# Altium PCB mchf_pro_ui.PcbDoc (part 2 of 7)
Units mil, origin at the board's own origin, x right, y up, seen from the top; angles counter-clockwise.
Board outline 7877.73 x 5661.04 mil, 2 copper layers (Top Layer, Bottom Layer); 345 components, 345 nets, 1318 pads, 783 vias.
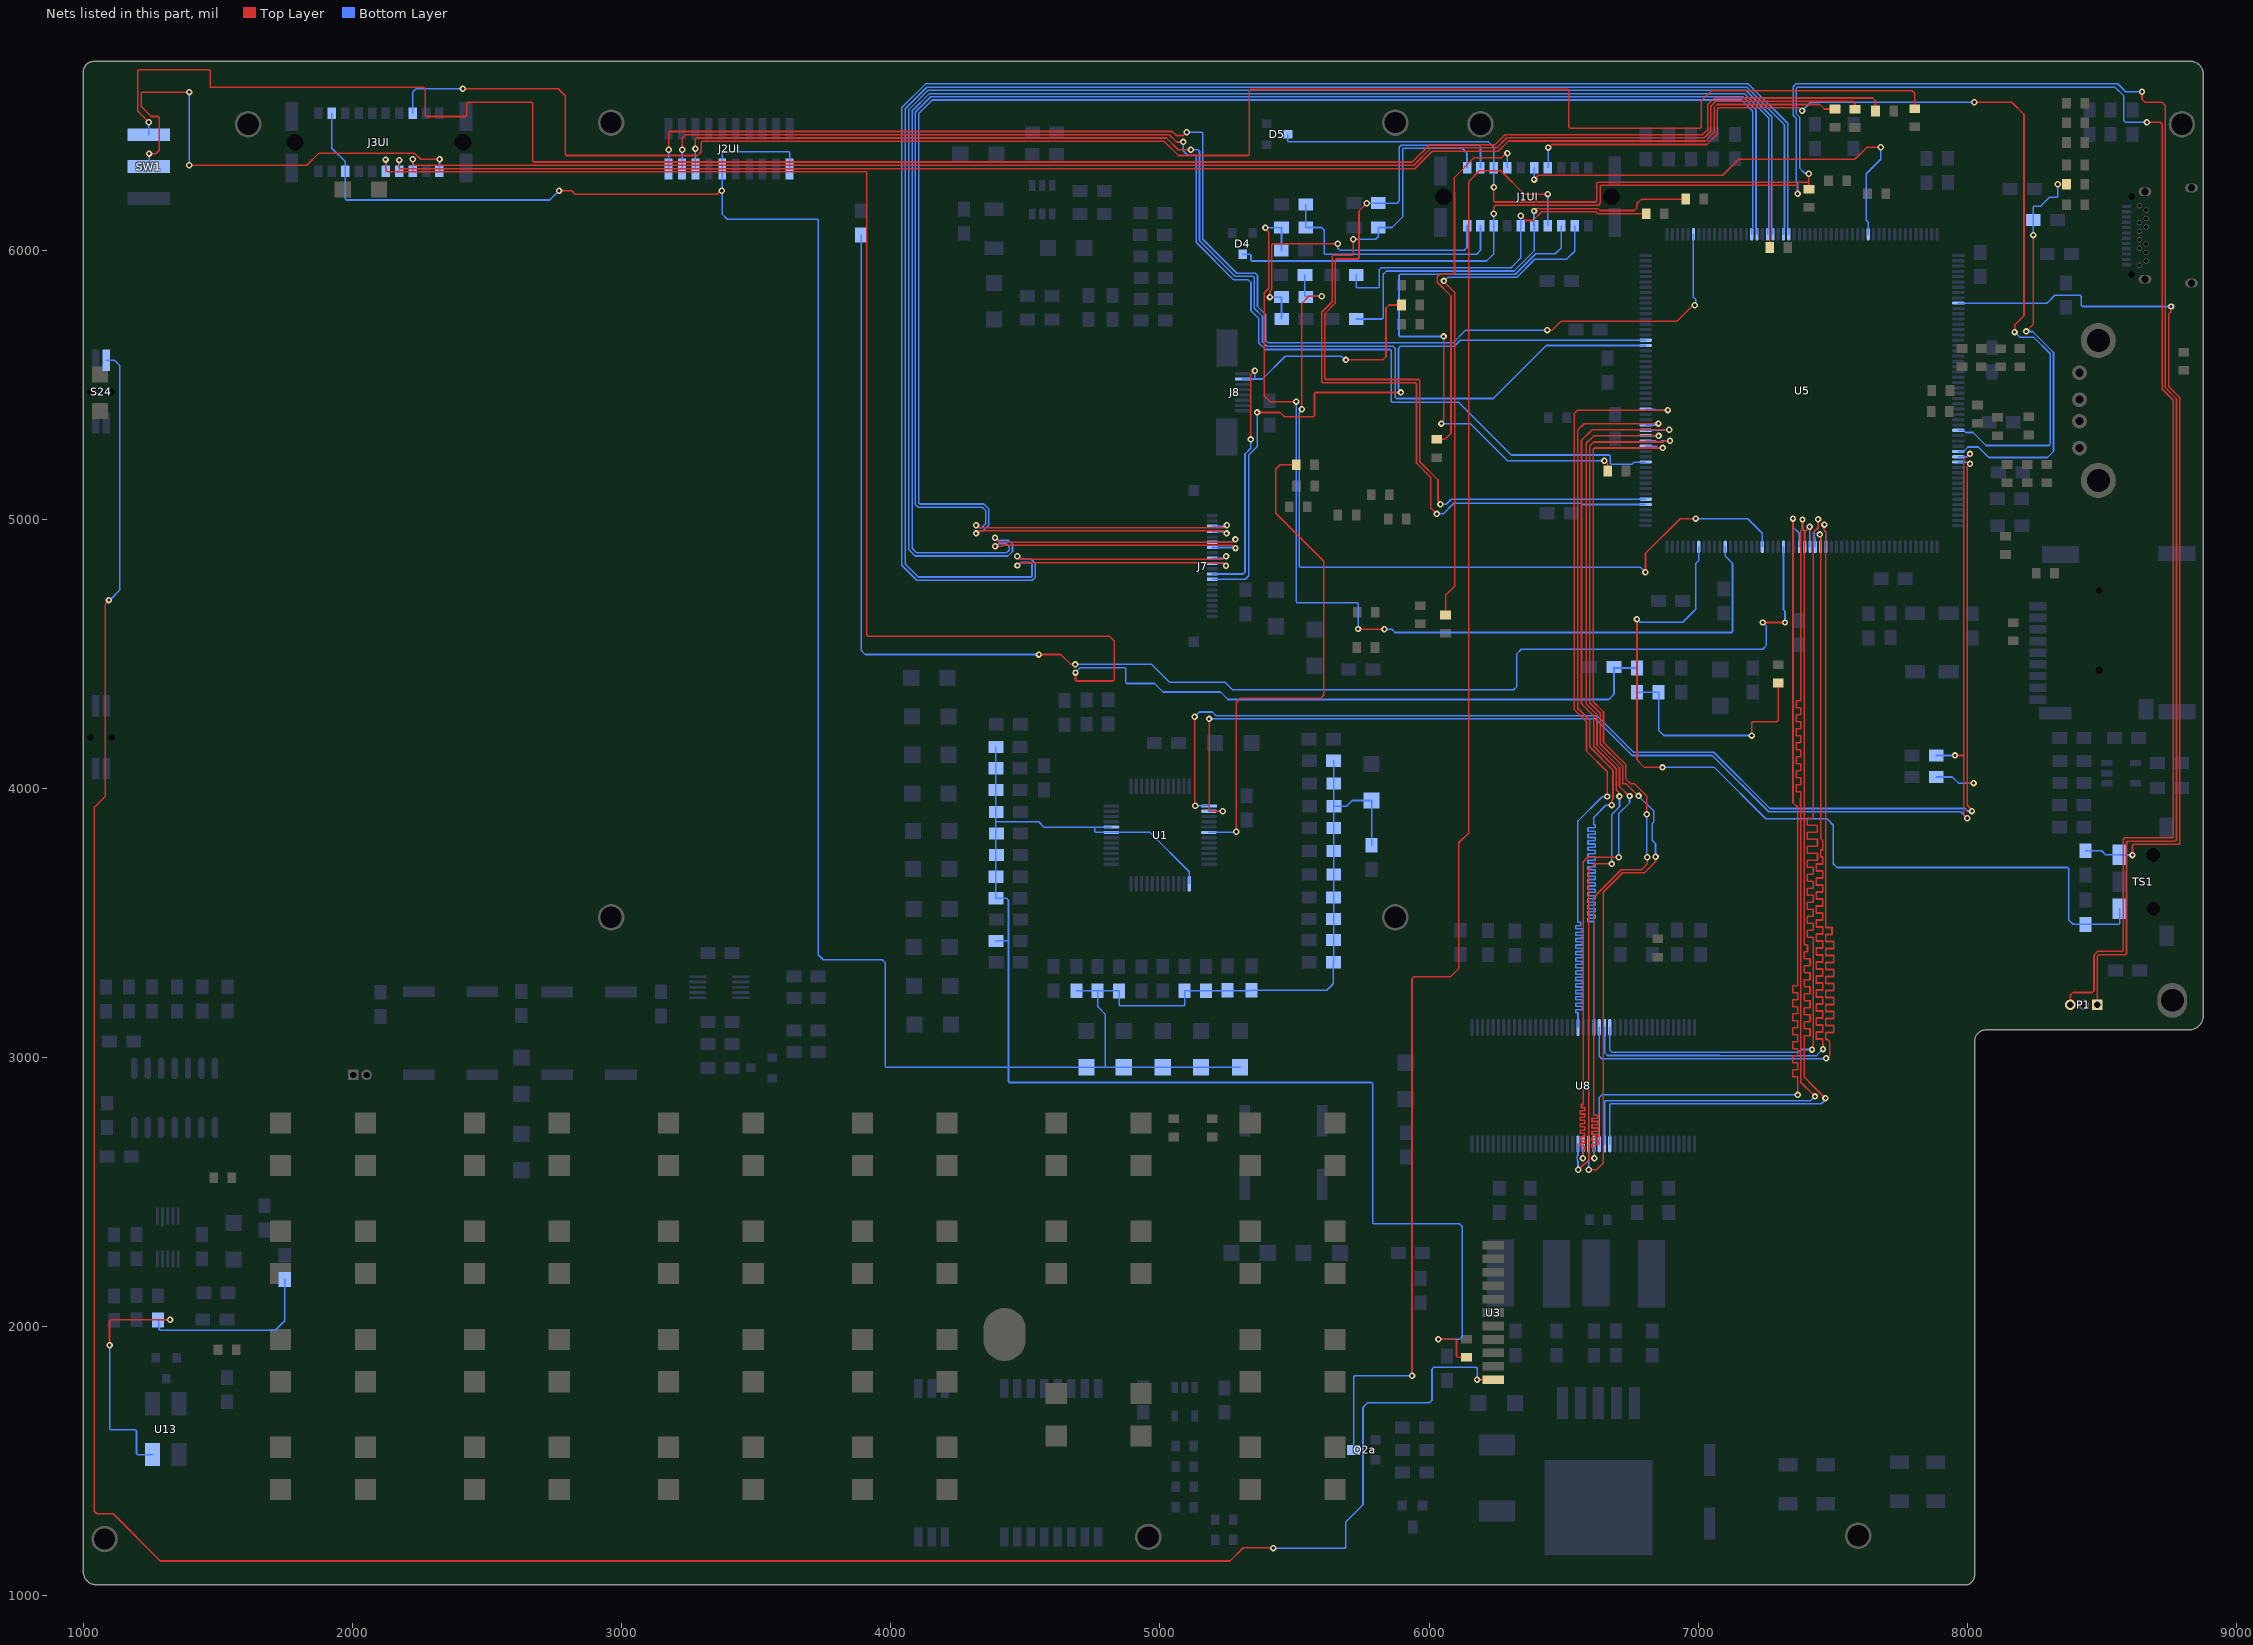
[diagram p2: the nets of this part, all layers, seen from the top]

## Part data
C1 C2 C3 C4 C5 C6 C7 C8 C9 C10 C11 C16 C17 C19 C20 C21a C21b C42 C55 CC14E CC17E CC18E CC19E CC20E CC25 CP44E: library part CAP-POL, "Electrolitic capacitor"
  C1 C55 CC17E CC18E: Order="FN 233-3009", Price=0.204, QT Order=QCC-00166
  C2: Notes="Tantalum capacitor", Order="FN 145-7406", Price=0.235, QT Order=QCC-00165
  C3 C4 C5 C6 C7 C8 C9 C10 C11: Order="FN 145-7406", Price=0.235, QT Order=QCC-00165
  C16 C21b: Notes="Aluminium capacitor", Price=0.34
  C17 C20 C21a: Order="FN 225-4321", Price=0.34, QT Order=QCC-00320
  C19: Notes="Aluminium capacitor", Order="FN 225-4321", Price=0.34, QT Order=QCC-00320
  C42: Order="FN 145-7414", Price=0.30, QT Order=QCC-00166
  CC14E: Notes="Tantalum capacitor", Order="FN 233-3009", Price=0.204, QT Order=QCC-00166
  CC19E CC25: Notes="Tantalum Capacitor", Price=0.204
  CC20E: Price=0.204
  CP44E: Order="FN 145-7406", Price=0.235, QT Order=QCC-00172
C12 C13 C14 C15 C18 C21 C22 C23 C24 C25 C26 C28 C29 C30 C31 C32 C33 C41 C45 C46 C51 C53 C54 C56 C61 C62 CC5 CC7 CC8 CC9 CC10 CC11 CC12 CC14 CC15 CC16 CC17 CC18 CC19 CC20 CC21 CC22 CC23 CC24 CC26 CC26a CC27 CC27a CC28 CC29 CC30 CC33 CC34 CC36 CC46 Cp7 Cp17 Cp29 Cp44 Cp49 Cp56 Cp74 Cp80 Cp100 Cp108 Cp114 Cp117 CP119 CP119E Cp133 Cp155 Cp161 Cp179 Cp187 Cp208 Cr1 Cr3 Cr9 Cr15 Cr29 Cr35 Cr41 Cr43 Cr49 Cr55 Cr75 Cr81: library part CAP, "Capacitor"
  C12 C13 C46 C51 CC15 CP119 CP119E: Published=8-Jun-2000, Publisher="Altium Limited", Revision="July-2002: Re-released for DXP Platform."
  C14 C15 C18 C21 C22 C23 C24 C25 C53 C54 C56 C62 CC5 CC14 CC17 CC18 CC19 CC20 CC30 CC36 CC46: Order="FN 252-2090", Price=0.068, QT Order=QCC-00154
  C26 C61: Order="FN 174-0673", Price=0.068, QT Order=QCC-00154
  C28 C29 C41 C45 Cp7 Cp17 Cp29 Cp44 Cp49 Cp56 Cp74 Cp80 Cp100 Cp108 Cp114 Cp117 Cp133 Cp155 Cp161 Cp179 Cp187 Cp208 Cr1 Cr3 Cr9 Cr15 Cr29 Cr35 Cr41 Cr43 Cr49 Cr55 Cr75 Cr81: Order="FN 282-1264", Price=0.089, QT Order=QCC-00157
  C30: Order="FN 190-7054", Price=0.038, QT Order=QCC-00259, QT Price=0.05
  C31: Order="FN 190-7054", Price=0.038, QT Order=QCC-00259
  C32: Order="FN 756-8401", Price=0.341, QT Order=QCC-00266, QT Price=0.045
  C33: Order="FN 756-8401", Price=0.341, QT Order=QCC-00266
  CC16: Notes="Ceramic Capacitor, low ESR", Published=8-Jun-2000, Publisher="Altium Limited", Revision="July-2002: Re-released for DXP Platform."
C27 C52 CP140: library part "CAP SMD 0603  X5R 1礔 25V 10%", "0603  X5R 1礔", Rated voltage=25V, Temperature Max=+125癈, Temperature Min=-55癈, Tolerance=10%, Order code Farnell=1288202RL, Technology=X5R
C34 C36 C38 C39 C48 C49 C50: library part CAP, "Capacitor", Voltage=100V
  C34 C36 C38 C39: Price=0.068, QT Order=QCC-00154
  C48 C49 C50: Notes=COG/NPO
C35: library part CAP-POL, "Electrolitic capacitor", Voltage=25V, Price=0.235, QT Order=QCC-00202
C37: library part CAP-POL, "Electrolitic capacitor", Voltage=16V, Price=0.235, QT Order=QCC-00202
C43: library part CAP, "Ceramic Capacitor", Order="FN 175-9477", Price=0.114, QT Order=QCC-00447
C44: library part CAP-POL, "Electrolitic capacitor", Voltage=50V, Order="FN 145-7406", Price=0.235, QT Order=QCC-00172
C47 CP43E: library part "Cap Pol1", Published=8-Jun-2000, Publisher="Altium Limited", Revision="July-2002: Re-released for DXP Platform."
CP43 CP199: library part Cap, "Capacitor", Published=8-Jun-2000, Publisher="Altium Limited", Revision="July-2002: Re-released for DXP Platform."
CP89 CP152: library part cap, "Capacitor", ECCN_US/EU=NA, Fitted=NO, Notes="Ceramic capacitor, low ESR", Ordered by=Subcon, Published=8-Jun-2000, Publisher="Altium Limited", Revision="July-2002: Re-released for DXP Platform."
D1 D2 D3: library part "D Zener", "Zener Diode", LatestRevisionDate=17-Jul-2002, LatestRevisionNote="Re-released for DXP Platform.", PackageDescription="Diode, Thru-Hole; 2 Leads; 0.7 in Pin Spacing", PackageReference=DIODE-0.7, Published=8-Jun-2000, Publisher="Altium Limited"
D4 D5: "Small Signal Diode, Dual Series", Order="FN 162-1837", Price=0.0618
  D4: QT Order=QCD-00039
D6 D7 D9 D10 D11: "DIODE, SCHOTTKY, 1A, 60V, SOD-123F", QT Order=QCD-00034
  D6 D7 D9 D10: Price=0.085
  D11: Order="FN 151-0694", Price=0.262, QT Price=0.08
D8: library part PMEG6010CEH, "DIODE, SCHOTTKY, 1A, 60V, SOD-123F", Price=0.085, QT Order=QCD-00034
J1UI J3UI: "SMD male connector, nominal current: 2.2 A, Test voltage: 840 VAC, number of positions: 20, pitch: 1.27 mm, color: black, contact surface: Gold, type of contact: Male connector, mounting: SMD soldering", Manufacturer_Name="Phoenix Contact", Mouser Part Number=651-1373866, Datasheet Link=http://www.phoenixcontact.com/gb/produkte/1373866, Geometry.Height=6.75mm, Manufacturer_Part_Number=1373866, Mouser Price/Stock=https://www.mouser.co.uk/ProductDetail/Phoenix-Contact/1373866?qs=2SLPxufLcgAs0enIXKjUUw%3D%3D
J2UI: library part YQ_20p, "SMD male connector, nominal current: 2.2 A, Test voltage: 840 VAC, number of positions: 20, pitch: 1.27 mm, color: black, contact surface: Gold, type of contact: Male connector, mounting: SMD soldering", Manufacturer_Name="Phoenix Contact", Mouser Part Number=651-1373866, Datasheet Link=http://www.phoenixcontact.com/gb/produkte/1373866, Geometry.Height=6.75mm, Manufacturer_Part_Number=1373866, Mouser Price/Stock=https://www.mouser.co.uk/ProductDetail/Phoenix-Contact/1373866?qs=2SLPxufLcgAs0enIXKjUUw%3D%3D
J4: library part usbc_24p, "Universal Serial Bus (USB) Shielded I/O Receptacle, Type C, Vertical, Surface Mount, Height 8.8mm, 16 Circuits, Gold (Au) Flash Plating", Manufacturer_Name=Molex, Mouser Part Number=538-219320-0001, Datasheet Link=https://www.molex.com/content/dam/molex/molex-dot-com/products/automated/en-us/salesdrawingpdf/219/219320/2193200001_sd.pdf?inline, Geometry.Height=9.05mm, Manufacturer_Part_Number=219320-0001, Mouser Price/Stock=https://www.mouser.co.uk/ProductDetail/Molex/219320-0001?qs=rQFj71Wb1eXha8qVBIXu3A%3D%3D
J5: "USB Host Connector"
J6: library part microSD-PJS008-2003, "Memory Card Connectors MicroSD Card Conn Revrs Mnt Push-Push", Manuf_1=YAMAICHI, Manuf_Part_1=PJS008-2003-1, ECCN_US/EU=n/a, Order=PJS008-2003-1
J7: library part KD050FWFID042-C010B, "LCD-20pin FPC, Top contacts position", Notes="FPC Board Connector, 0.5 mm, 20 Contacts, Receptacle, Top contacts position!", Order="FN 3215802"
J8: library part FPC8, "8 pin FPC, Top contacts position", Notes="FPC Board Connector, 0.5 mm, 8 Contacts, Receptacle,Top contact position", Order="FN 2614916"
L1 RFC4: library part TDK-NLV25T, "POWER INDUCTOR, 47UH, 1210", Notes="Power inductor", Price=0.166
LD1 LD2 LD6: library part LED2, "LED 3mm", Price=0.116, QT Order=QCD-00052, Revision="July-2002: Re-released for DXP Platform."
"LORA ANT": "Test point"
M0 M1 M53 M54 M55 M56 M57 M58 M58a M58b M60 R1 R1a R1b R2 R3 R4 R5 R6 R7 R8 R9 R10 R11 R12 R13 R14 R15 R16 R17 R18 R19 R19a R19b R20 R21 R21a R21b R22 R23 R23a R24 R25 R26 R27 R28 R29 R30 R31 R32 R33 R34 R35 R35a R36 R37 R38 R39 R42 R43 R44 R45 R46 R47 R48 R49 R50 R51 R52 R53 R54 R59: library part RES, "Resistor"
  M0 M1 M53 M54 M55 M56 M57 M58 M58a M58b M60: Order="FN 933-3681", Price=0.009, QT Order=QCR-00268
  R1 R2 R17 R18: Order="FN 933-2421", Price=0.013, QT Order=QCR-00279
  R1a R1b R21a R21b R47 R48 R49 R53 R54: Order="FN 200-8383", Price=0.024, QT Order=QCR-00341
  R3 R4 R5 R6: Price=0.013
  R7 R19 R20 R21 R30: Order="FN 146-9899", Price=0.023, QT Order=QCR-00309
  R8 R11 R12 R13 R14: Order="FN 188-7289", Price=0.046, QT Order=QCR-00333
  R9 R10: Order="FN 157-6459", Price=0.061, QT Order=QCR-00579
  R15 R16 R19a R19b: Order="FN 207-8984", Price=0.02, QT Order=QCR-00412
  R22 R23 R23a R24: Order="FN 146-9857", Price=0.046, QT Order=QCR-00349, QT Price=0.03
  R25 R26 R27 R28 R29 R32 R33 R34: Order="FN 146-9857", Price=0.046
  R31 R50 R51 R52 R59: Order="FN 933-2375", Price=0.027, QT Order=QCR-00301
  R35 R35a R39: Price=0.024, QT Order=QCR-00341
  R36: Order=652-CR0805JW-162ELF, Price=0.024, QT Order=QCR-00341
  R42: Order="FN 157-6459", Price=0.061, QT Order=QCR-00326
  R43 R44: Order="FN 200-8383", Price=0.03, QT Order=QCR-00341
  R45: Order="FN 188-7289", Price=0.075, QT Order=QCR-00333, QT Price=0.03
  R46: Notes="What is the biggest power rating to fit into 1206 ?", Order="FN 207-3875", Price=0.024, QT Order=QCR-00419, QT Price=0.03
M2 M2a M3 M3a M3b M3d M3e M3h M4 M5 M6 M7 M8 M9 M10 M11 M12 M13 M14 M15 M16 M17 M18 M19 M20 M21 M22 M23 M24 M25 M26 M27 M28 M29 M30 M32 M32a M33 M34 M35 M36 M37 M38 M39 M40 M43 M44 M45 M46 M47 M48 M49 M50 M51 M51a M51b M51c M51d M51e M51f M52 M59: library part Link, "Link", Published=8-Jun-2000, Publisher="Altium Limited", Revision="July-2002: Re-released for DXP Platform."
P0: library part MHDR1X2, "Header, 2-Pin", LatestRevisionDate=17-Jul-2002, LatestRevisionNote="Re-released for DXP Platform.", Publisher="Altium Limited"
P1: "Header, 3-Pin", LatestRevisionDate=17-Jul-2002, LatestRevisionNote="Re-released for DXP Platform.", Publisher="Altium Limited"
Q1 Q2 Q2a: library part MOSFET-N, "N-Channel MOSFET", Price=0.231, QT Order=QCT-00022, QT Price=0.28
  Q1: Order="FN 186-4517"
RFC1 RFC2 RFC3 RFC7: library part Inductor, "Inductor"
  RFC1 RFC2 RFC7: Order="FN 166-9895", Price=0.16
  RFC3: Published=8-Jun-2000, Publisher="Altium Limited", Revision="July-2002: Re-released for DXP Platform."
RFC5 RFC6: library part Inductor, "Power Inductor", Price=0, QT Order=QCL-00097, QT Price=0.085
  RFC5: Notes="Don't we already have selection for 0.8.0(bigger than 0805) ?"
S0 S1 S2 S3 S4 S5 S6 S7 S8 S9 S10 S11 S12 S13 S14 S15 S16 S17 S18 S19 S20 S21 S23: library part SW-PB, "Push Button"
S22 S24: library part SW-PBS, "Push Side Button"
SW1: library part SW3, "Three pole switch", Order="FN 118-1070", Price=2.19
TS1: "Thumbwheel Toggle Switch", Order="FN 206-4978"
U1: "Audio CODEC"
U2: library part LM4853, "Mono 1.5 W / Stereo 300mW Power Amplifier", Notes="300mW 1ch Mono, 2ch Stereo Audio Amp"
U3: "KCX_BT_EMITTER V 1.7"
U4 U9: library part AP22811, "High-side switch", Order="FN 274-8550"
U5: "STM32H747BIT6 LQFP208", Order="FN 248-4976", Price=10.97
U6: "V REG ADJ +5/20V, SMPS TO-263-5", Notes="In bulk from Ali", Price=1.28
U7: "Charge Pump", Notes="Originally from Thomas, if not Ali", Order=Hotmcu.com, Price=0.5, QT Order=QCI-01775, QT Price=0.27
U8: "128Mb PC133 SDR SDRAM, 4Mb x 32, 6ns, 3.3V, 0 to 70 degC, 86-Pin TSOP", Order="FN 225-3746", Price=8.55
U10: "Lora Module"
U11: "I2C-Programmable Any-Frequency CMOS Clock Generator + VCXO, 2.5 / 3.3 V, 0.008 to 160 MHz Output, -40 to 85 degC, 10-pin SOP", MANUFACTURER="Silicon Labs", Output Frequency (MHz)="0.008 to 160", Supplier Part Number 1=336-1994-5-ND, Code_IPC=J-STD-020, Code_JEDEC=MO-187, ComponentLink1Description="Manufacturer URL", ComponentLink1URL=http://www.silabs.com/, ComponentLink2Description=Datasheet, ComponentLink2URL=http://www.silabs.com/Support%20Documents/TechnicalDocs/Si5351.pdf, ComponentLink3Description="Package Specification", ComponentLink3URL="http://www.silabs.com/Support Documents/TechnicalDocs/C8051T60x.pdf", DatasheetVersion="Rev. 0.95", Mounting Technology="Surface Mount", Notes="Farnell had it cheap (like 80 pence)", Output Format=LVCMOS, PackageDescription="10-Pin Mini Small Outline Package, Body 3 x 3 mm, Pitch 0.5 mm", PackageReference=MSOP-10, PartNumber=Si5351A-A-GT, Reference Inputs=1, Sub-Family="Clock Generators", Supplier 1=Digi-Key, Supplier 2=Mouser, Supplier Part Number 2=634-SI5351A-A-GT, VDD="2.5 V; 3.3 V"
U12: library part 74LCX74M, "Low Voltage Dual D-Type Positive Edge-Triggered  Flip-Flop with 5V Tolerant Inputs", Notes="Can use PO74G74A, but remove M52, install M53", Order="FN 985-3502", Price=0.23, QT Order=QCI-00713
U13: library part FOX924B-16.000, "TCXO", Order="FN 206-3959", Price=2.77
U14: "3.3V voltage reference, SOT-23"
Y1: library part SmdCrystal, "32kHz Crystal", Order="FN 283-2029", Price=0.34

## Free pads (board coordinates)
  round 98.43 hole 78.74: 1(1078.74,1211.61) 1(1612.2,6468.5) 1(2960.87,3521.65) 1(2960.88,6474.41) 1(4956.69,1219.49) 1(5874.41,3521.65) 1(5874.41,6474.41) 1(6191.04,6468.5) 1(7594.42,1223.81) 1(8797.24,6468.5)
  oval 110.24x130 hole 85: ""(8761.69,3213.44)

## Via types
v1: diameter 24, hole 12, Top Layer to Bottom Layer, 779 vias
v2: diameter 30, hole 15, Top Layer to Bottom Layer, 4 vias

## Nets (pads, with @x,y where several pads share a name; then routed paths per layer and width w, separated by ;. In a path a pad name is that pad's centre, name@x,y a point inside that pad or via, vN(x,y) a via of type N, cw(c..) or ccw(c..) an arc to the next point about the centre after c; other vN are vias at no path point)
ADC3_INP1: D3.2 R21.2 U5.41 | length 3705.9
  Top Layer w6: v1(5391.73,6083.66) 5391.73,6079.56 5403.88,6067.41 5403.88,5859.02 5387.65,5842.79 5387.65,5458.99 5408.65,5437.99 v1(5506.56,5437.99) ; v1(5736.4,4592.9) 5736.65,4592.66 5833.82,4592.66 v1(5834.07,4592.41)
  Bottom Layer w6: v1(5391.73,6083.66) 5450.79,6083.66 R21.2@5451.77,6084.65 5451.77,6000 D3.2@5450.79,5999.02 ; v1(5506.56,5437.99) 5505.86,5437.29 5505.86,4695.16 5510.07,4690.94 5732.89,4690.94 5736.4,4687.43 v1(5736.4,4592.9) ; v1(5834.07,4592.41) 5860.82,4592.41 5873.38,4579.85 7123.94,4579.85 7127.45,4583.37 7127.45,4837.35 7100.36,4864.45 U5.41@7100.36,4898.21
ADC3_INP1x: C23.2 J1UI.A19 R21.1 | length 924
  Bottom Layer w6: C23.2@5541.77,6170.28 R21.1@5541.77,6084.65 5601.01,6084.65 5610.7,6074.95 5610.7,6069.98 5610.24,6069.52 5610.24,5988.54 5613.19,5985.59 6176.63,5985.59 6191.04,5999.99 J1UI.A19@6191.04,6090.79
ADC3_INP3: D1.2 M43.1 R7.2 | length 864.6
  Top Layer w6: v1(7199.1,4196.9) 7198.87,4197.13 7198.87,4244.55 7202.38,4248.06 7291.34,4248.06 7297.21,4253.93 M43.1@7297.21,4392.4
  Bottom Layer w6: R7.2@6772.87,4357.83 D1.2@6853.11,4357.83 6853.11,4215.59 6871.69,4197.02 7198.98,4197.02 v1(7199.1,4196.9)
ADC3_INP3x: C14.2 J3UI.A6 R7.1 | length 7125.8
  Top Layer w6: v1(2122.9,6336.96) 2122.9,6299.15 2130.71,6291.34 3907.83,6291.34 3911.34,6287.82 3911.34,4569.7 3914.86,4566.19 4812.38,4566.19 4829.91,4548.65 4829.91,4403.12 4826.4,4399.61 4689.77,4399.61 4686.25,4403.12 v1(4686.27,4431.2)
  Bottom Layer w6: v1(2122.9,6336.96) 2122.9,6293.44 J3UI.A6@2123.03,6293.31 ; v1(4686.27,4431.2) 4686.27,4432.32 4703.35,4449.4 4869.29,4449.4 4872.81,4445.88 4872.81,4394.1 4876.32,4390.58 4979.59,4390.58 5011.15,4359.02 5224.74,4359.02 5252.77,4330.98 6667.23,4330.98 6687.13,4350.89 C14.2@6687.13,4452.17 6691.47,4447.83 R7.1@6772.87,4447.83
ADC3_INP6: D2.2 R20.2 U5.34 | length 3133.7
  Top Layer w6: v1(5527.56,5409.45) 5527.56,5803.7 5553.13,5829.26 v1(5601.01,5829.26) ; v1(6804.06,4804.13) 6804.06,4874.13 6933.05,5003.12 v1(6991,5003.12)
  Bottom Layer w6: v1(5527.56,5409.45) 5527.56,5406.63 5517.86,5396.93 5517.86,4826.14 5521.38,4822.62 6785.57,4822.62 v1(6804.06,4804.13) ; D2.2@5538.69,5908.96 5538.69,5829.26 v1(5601.01,5829.26) ; v1(6991,5003.12) 7184.08,5003.12 7238.16,4949.05 U5.34@7238.16,4898.21
ADC3_INP6x: C22.2 J1UI.A20 R20.1 | length 1154
  Top Layer w6: v1(5408.65,5826.18) 5409.02,5826.55 5409.02,5847.18 5415.88,5854.05 5415.88,6021.09 5419.4,6024.61 v1(5660.43,6024.61)
  Bottom Layer w6: v1(5408.65,5826.18) R20.1@5451.77,5826.18 5451.77,5745.52 C22.2@5452.63,5744.66 ; v1(5660.43,6024.61) 5661.2,6023.84 5661.2,6007.67 5668.87,6000 6130.91,6000 6141.04,6010.13 J1UI.A20@6141.04,6090.79
ADC3_INP8: R30.1 U5.30 | length 5566
  Top Layer w6: v1(4550.4,4498.03) 4631.98,4498.03 4667.34,4462.67 4682.3,4462.67 4683.78,4461.19 v1(4685.44,4461.19) ; v1(7239.47,4617.07) v1(7322.48,4617.07)
  Bottom Layer w6: R30.1@3889.76,6056.96 3889.76,4512.77 3904.5,4498.03 v1(4550.4,4498.03) ; v1(4685.44,4461.19) 4685.65,4461.4 4969.27,4461.4 5035.65,4395.02 5241.41,4395.02 5269.44,4366.98 6314.43,4366.98 6325.24,4377.79 6325.24,4500.14 6342.88,4517.78 7239.63,4517.78 7253.48,4531.62 7253.48,4603.06 v1(7239.47,4617.07) ; U5.30@7316.9,4898.21 7316.9,4664.93 7322.48,4659.35 v1(7322.48,4617.07)
AGND: CC7.1 CC8.1 CC9.2 CC10.2 CC11.1 CC12.1 CC14.1 CC14E.2 CC15.1 CC16.1 CC17.1 CC17E.2 CC18.2 CC18E.2 CC19.1 CC19E.2 CC20.2 CC20E.2 CC21.2 CC22.2 CC23.1 CC24.1 CC25.2 CC26.2 CC27.2 CC28.1 CC29.1 CC30.1 CC33.2 CC34.2 J2UI.A11 J2UI.A16 J3UI.A3 J3UI.A12 M1.2 M2a.1 R5.2 R6.2 U1.13 U1.31 U1.32 | length 15013.9
  Top Layer w6: v1(2767.38,6221.26) 2767.54,6221.11 2814.23,6221.11 2826.52,6208.82 3354.87,6208.82 3367.16,6221.11 v1(3372.04,6221.11) ; v1(6034.76,1953.54) 6035.25,1954.03 6098.52,1954.03 6102.03,1950.51 6102.03,1890.04 6105.55,1886.53 M2a.1@6138.78,1886.53 M2a.1@6138.39,1886.13
  Bottom Layer w6: J3UI.A12@1923.03,6509.84 1923.03,6379.13 1973.62,6328.55 1973.62,6190.52 1977.13,6187.01 2733.13,6187.01 v1(2767.38,6221.26) ; v1(3372.04,6221.11) 3372.92,6221.11 v1@3373.07,6221.26 ; J2UI.A11@3623.82,6301.97 3624.22,6302.37 3624.22,6363.38 3620.7,6366.89 3377.28,6366.89 3373.76,6363.38 J2UI.A16@3373.82,6301.97 J2UI.A16@3373.82,6301.97 3373.07,6301.22 v1@3373.07,6221.26 ; R5.2@4390.47,4155.12 R6.2@4390.47,4075.45 4390.47,3994.75 4390.47,3913.2 4390.47,3876.45 ; CC26.2@4390.63,3433.42 4391.54,3434.32 4437.33,3434.32 ; CC28.1@4391.39,3672.41 CC28.1@4390.47,3672.41 ; CC24.1@4690.02,3248.63 CC23.1@4768.6,3248.63 ; U1.32@4819.67,3856.76 4757.65,3856.76 ; U1.13@5109.04,3646.13 5109.04,3691.21 4963.17,3837.08 U1.31@4819.67,3837.08 4761.17,3837.08 4757.65,3840.59 4757.65,3856.76 ; CC17E.2@5298,2964.3 CC18E.2@5152.95,2964.3 CC19E.2@5010.61,2964.3 CC20E.2@4865.43,2964.3 4796.12,2964.3 ; CC7.1@5645.17,4103.43 5645.17,4018.9 CC9.2@5645.17,3934.52 ; M1.2@5786.7,3789.15 CC14E.2@5786.7,3955.8 5714.44,3955.8 5693.16,3934.52 CC9.2@5646.32,3934.52 CC9.2@5645.17,3934.52 ; v1(6034.76,1953.54) 6113.12,1953.54 6123.66,1964.09 6123.66,2372.26 6113.05,2382.87 5793.64,2382.87 5790.12,2386.39 5790.12,2904.22 5786.61,2907.73 4440.84,2907.73 4437.33,2911.25 4437.33,2964.3 ; v1@3373.07,6221.26 3373.07,6134.8 3392.41,6115.46 3726.74,6115.46 3730.26,6111.95 3730.26,3382.8 3748.6,3364.47 3968.09,3364.47 3978.7,3353.85 3978.7,2967.82 3982.22,2964.3 4437.33,2964.3 ; CC28.1@4390.47,3672.41 4390.47,3753.76 4390.47,3832.61 4390.47,3876.45 ; CC28.1@4390.47,3672.41 CC27.2@4390.47,3592.46 4430.52,3592.46 4437.33,3585.66 4437.33,3434.32 ; 4390.47,3876.45 4549.44,3876.45 4569.13,3856.76 4757.65,3856.76 ; 4437.33,2964.3 CC25.2@4726.82,2964.3 4796.12,2964.3 ; 4437.33,2964.3 4437.33,3434.32 ; CC23.1@4768.6,3248.63 4847.41,3248.63 CC22.2@4848.26,3247.77 4848.26,3197.1 4851.78,3193.58 5088.45,3193.58 5091.96,3197.1 CC21.2@5091.96,3248.68 CC20.2@5171.82,3248.68 5251.21,3248.68 5337.94,3248.68 CC18.2@5339.81,3250.55 5619.97,3250.55 5644.42,3275.01 5644.42,3354.53 CC17.1@5644.72,3354.83 5645.17,3355.28 5645.17,3437.3 5645.17,3515.68 5645.17,3595.03 5645.17,3680.3 5645.17,3768.38 5645.17,3853.78 CC9.2@5645.17,3934.52 ; CC23.1@4768.6,3248.63 4768.6,3190.05 4796.12,3162.53 4796.12,2964.3
ATT_CLK: J2UI.A19 U5.65 | length 4653.3
  Top Layer w6: v1(3225.22,6373.36) 3225.22,6417.67 3237.01,6429.46 5034.36,6429.46 5061.26,6402.56 v1(5086.61,6402.56)
  Bottom Layer w6: J2UI.A19@3225.22,6306.28 v1(3225.22,6373.36) ; v1(5086.61,6402.56) 5086.61,6369.53 5103.28,6352.86 5131.33,6352.86 5134.84,6349.35 5134.84,6029.64 5273.4,5891.08 5327.53,5891.08 5338.33,5880.29 5338.33,5775.71 5367.55,5746.49 5367.55,5655.94 5392.05,5631.44 5855.71,5631.44 5859.23,5627.92 5859.23,5439.06 5862.74,5435.55 6109.06,5435.55 6305.13,5239.48 6669.48,5239.48 6672.99,5235.96 6672.99,5209.3 6676.51,5205.78 6754.52,5205.78 6761.91,5213.17 U5.65@6805.08,5213.17
ATT_DATA: J2UI.A20 U5.110 | length 4963.2
  Top Layer w6: v1(3174.78,6373.8) 3174.78,6437.95 3178.29,6441.46 5045.69,6441.46 5060.63,6426.52 5086.96,6426.52 v1(5099.41,6438.98) ; v1(6438.92,5703.61) 6440.21,5702.31 6456.03,5702.31 6490.69,5736.97 6922.43,5736.97 6981.03,5795.56 v1(6987.55,5795.56)
  Bottom Layer w6: J2UI.A20@3174.78,6307.47 v1(3174.78,6373.8) ; v1(5099.41,6438.98) 5155.64,6438.98 5159.15,6435.46 5159.15,6040.86 5284.93,5915.08 5353.62,5915.08 5362.33,5906.37 5362.33,5791.03 5384.41,5768.95 5393.03,5760.33 5393.03,5664.4 5401.49,5655.94 6088.68,5655.94 6136.35,5703.61 v1(6438.92,5703.61) ; U5.110@6982.25,6059.62 6982.25,5825.51 6990.79,5816.97 6990.79,5798.8 v1(6987.55,5795.56)
ATT_LE: J2UI.A18 U5.87 | length 4551
  Top Layer w6: v1(3273.93,6377.6) 3273.93,6413.95 3277.44,6417.46 5024.46,6417.46 5067.91,6374.02 v1(5115.06,6374.02)
  Bottom Layer w6: J2UI.A18@3273.58,6302.21 3273.58,6377.26 v1(3273.93,6377.6) ; v1(5115.06,6374.02) 5141.53,6374.02 5147.15,6368.39 5147.15,6035.89 5279.96,5903.08 5346.59,5903.08 5350.33,5899.34 5350.33,5784.62 5381.03,5753.92 5381.03,5659.43 5397.02,5643.44 5865.85,5643.44 5874.2,5635.08 5874.2,5453.11 5877.92,5449.39 6238.73,5449.39 6435.58,5646.24 U5.87@6805.08,5646.24
BAND0: J3UI.A8 M34.1 | length 5601.8
  Top Layer w6: v1(2223.48,6338) 2224.22,6337.27 2224.22,6321.04 2229.14,6316.12 5942.7,6316.12 6007.11,6380.52 6251.28,6380.52 6288.74,6417.98 7022.31,6417.98 7046.91,6442.59 7046.91,6535.62 7065.24,6553.94 7575.98,6553.94 7582.68,6547.24 M34.1@7582.68,6523.91
  Bottom Layer w6: J3UI.A8@2223.03,6293.31 2223.48,6293.76 v1(2223.48,6338)
BAND1: J3UI.A7 M30.1 | length 5566.7
  Top Layer w6: v1(2173.59,6335.39) 2173.59,6306.85 2177.11,6303.34 5946.89,6303.34 6012.08,6368.52 6257.57,6368.52 6295.03,6405.98 7027.28,6405.98 7058.91,6437.62 7058.91,6530.65 7070.16,6541.9 7452.3,6541.9 7468.95,6525.25 M30.1@7507.81,6525.25
  Bottom Layer w6: J3UI.A7@2173.03,6293.31 2173.59,6293.87 v1(2173.59,6335.39)
BAND2: J1UI.A13 M7.1 | length 2152.4
  Top Layer w6: v1(6045.81,5356.04) 6045.81,5360.34 6054.03,5368.55 v1(6054.03,5680.07) ; v1(6651.73,5218.04) 6664.08,5205.68 M7.1@6664.08,5179.66
  Bottom Layer w6: v1(6045.81,5356.04) 6153.8,5356.04 6291.8,5218.04 v1(6651.73,5218.04) ; v1(6054.03,5680.07) 6053.68,5679.72 5891.94,5679.72 5888.43,5683.23 5888.43,5907.72 5891.94,5911.23 6320.74,5911.23 6396.27,5986.76 6469.36,5986.76 6491.04,6008.44 J1UI.A13@6491.04,6090.79
BAND3: J1UI.A12 M8.1 | length 1897.6
  Top Layer w6: v1(6055.04,5886.31) 6055.04,5884.28 6094.75,5844.58 6094.75,4751.77 6061.38,4718.41 M8.1@6061.38,4644.87
  Bottom Layer w6: v1(6055.04,5886.31) 6056.88,5886.31 6069.79,5899.23 6325.71,5899.23 6392.74,5966.26 6510.76,5966.26 6541.04,5996.53 J1UI.A12@6541.04,6090.79
BMS_PRES: J1UI.A14 Q2a.3 | length 5558.3
  Top Layer w6: v1(5936.74,1818.18) 5936.74,3293.63 5944.53,3301.42 6080.24,3301.42 6110.29,3331.47 6110.29,3798.53 6146.9,3835.14 6146.9,6255.68 6186.67,6295.45 6266.28,6295.45 6352.72,6209 v1(6441.04,6209)
  Bottom Layer w6: Q2a.3@5720.67,1542.66 5720.67,1814.67 5724.18,1818.18 v1(5936.74,1818.18) ; v1(6441.04,6209) 6441.04,6090.98 J1UI.A14@6441.23,6090.79
BMS_PWM: J3UI.A18 M39.1 | length 6514.7
  Top Layer w6: v1(2410.04,6600.39) 2763.93,6600.39 2790.49,6573.83 2790.49,6356.52 2794.65,6352.36 3281.9,6352.36 3295.71,6366.18 3295.71,6401.12 3299.23,6404.64 5016.07,6404.64 5068.59,6352.12 5328.44,6352.12 5331.95,6355.63 5331.95,6593.8 5335.46,6597.32 6515.42,6597.32 6519.67,6593.07 6519.67,6457.5 6523.19,6453.98 7007.4,6453.98 7010.91,6457.5 7010.91,6554.7 7049.11,6592.9 7795.75,6592.9 7804.93,6583.72 M39.1@7804.93,6526
  Bottom Layer w6: J3UI.A18@2223.03,6509.84 2223.48,6510.29 2223.48,6587.93 2235.94,6600.39 v1(2410.04,6600.39)
BMS_SCL: J1UI.A16 M45.1 R21b.1 | length 1386.3
  Top Layer w6: v1(6341.04,6128.32) 6358.44,6110.91 6386.41,6110.91 6418.61,6143.11 6619.75,6143.11 6626.78,6136.08 6626.78,6135.85 M45.1@6806.96,6135.85
  Bottom Layer w6: R21b.1@5729.62,5908.81 5729.62,5864.93 5733.14,5861.41 5811.99,5861.41 5815.51,5864.93 5815.51,5928.57 5822.16,5935.23 6305.13,5935.23 6319.29,5949.39 6341.04,5971.14 J1UI.A16@6341.04,6090.79 v1(6341.04,6128.32)
BMS_SDA: J1UI.A15 M47.1 R21a.1 | length 1607.4
  Top Layer w6: v1(6389.96,6146.11) 6393.47,6146.11 6402.47,6155.11 6627.45,6155.11 6634.7,6147.85 6761.81,6147.85 6771.49,6157.54 6771.49,6172.93 6788.98,6190.41 M47.1@6953.8,6190.41
  Bottom Layer w6: R21a.1@5729.62,5744.66 5826.21,5744.66 5829.72,5748.18 5829.72,5911.42 5841.54,5923.23 6315.77,5923.23 6390.26,5997.72 6390.26,6090.01 J1UI.A15@6391.04,6090.79 6389.96,6091.86 v1(6389.96,6146.11)
BOOT0: M3e.1 R34.2 U5.194 | length 1545
  Top Layer w6: v1(8219.23,5698.55) 8219.48,5698.55 8245.18,5724.25 v1(8245.18,6056.79) ; v1(8335.63,6245.27) M3e.1@8368.61,6245.27
  Bottom Layer w6: U5.194@7966.5,5252.54 7985.61,5252.54 8002.23,5269.15 8040.65,5269.15 8079.63,5230.17 8297.48,5230.17 8320.1,5252.78 8320.1,5620.56 8242.36,5698.3 8219.48,5698.3 v1(8219.23,5698.55) ; v1(8245.18,6056.79) R34.2@8245.18,6113.19 8245.18,6160.91 8248.69,6164.43 8272.88,6164.43 8305.12,6196.67 8332.12,6196.67 8335.63,6200.18 v1(8335.63,6245.27)
BST_EN: J1UI.A7 M27.1 | length 1377.3
  Top Layer w6: M27.1@6028.52,5297.26 6057.83,5297.26 6081.35,5320.78 6081.35,5830.31 6030.83,5880.83 6030.83,5901.9 6040.18,5911.24 6091.01,5911.24 6094.52,5914.76 6094.52,6216.94 6094.11,6217.36 6094.11,6270.77 6166.79,6343.45 6269.04,6343.45 6286.27,6360.68 v1(6291.04,6360.68)
  Bottom Layer w6: J1UI.A7@6291.04,6307.32 v1(6291.04,6360.68)
BT_PAIR: S24.2 U3.11 | length 10309.1
  Top Layer w6: v1(1094.88,4700.19) 1080.84,4686.16 1080.84,3970.22 1040.2,3929.58 1040.2,1314.84 1049.76,1305.28 1110.58,1305.28 1285.8,1130.06 5260.11,1130.06 5309.54,1179.49 5419.29,1179.49 v1(5420.92,1177.85) ; v1(6178.48,1803.16) 6238.18,1803.16 U3.11@6239.17,1804.13
  Bottom Layer w6: S24.2@1085.63,5591.54 1115.16,5591.54 1134.88,5571.81 1134.88,5281.76 1134.88,4737.7 1097.38,4700.19 v1(1094.88,4700.19) ; v1(5420.92,1177.85) 5686.45,1177.85 5689.96,1181.37 5689.96,1274.61 5754.67,1339.31 5754.67,1700.91 5771.28,1717.52 6000.98,1717.52 6011.06,1727.59 6011.06,1843.08 6017.74,1849.77 6174.97,1849.77 6178.48,1846.25 v1(6178.48,1803.16)
CLK_25Mhz: R50.2 R59.2 U13.3 | length 1593.3
  Top Layer w6: v1(1097.44,1931.38) 1096.97,1931.85 1096.97,2021.19 1102.36,2026.57 v1(1321.85,2026.57)
  Bottom Layer w6: v1(1097.44,1931.38) 1097.44,1621.67 1100.96,1618.15 1193.81,1618.15 1197.33,1614.64 1197.33,1528.89 1200.84,1525.37 U13.3@1256.65,1525.37 ; v1(1321.85,2026.57) 1278.62,2026.57 R50.2@1277.8,2025.75 1279.53,2024.01 1279.53,1993.11 1285.57,1987.07 1712.73,1987.07 1748.03,2022.37 R59.2@1748.03,2176.18
CODEC_RESET: M26.1 U1.6 | length 1916.7
  Top Layer w6: v1(5283.46,3839.57) 5283.46,4319.2 5299.28,4335.02 5596.95,4335.02 5608.56,4346.63 5608.56,4844.39 5430.12,5022.83 5430.12,5187.01 5446.77,5203.66 M26.1@5506.89,5203.66
  Bottom Layer w6: U1.6@5181.87,3837.08 5182.98,3838.19 5282.08,3838.19 v1(5283.46,3839.57)
CODEC_SCL: R1a.1 U1.2 U5.195 | length 4934.7
  Top Layer w6: v1@5183.45,4259.68 v1(5182.75,4258.98) 5182.75,3919.14 5186.27,3915.63 v1(5233.43,3915.63) ; v1(7954.16,4123.12) 7987.26,4123.12 ; v1(8000,3889.7) 7987.26,3902.44 7987.26,4123.12 ; v1(8009.86,5243.51) 7987.26,5220.91 7987.26,4123.12
  Bottom Layer w6: U1.2@5181.23,3915.18 U1.2@5181.87,3915.81 5181.96,3915.72 5233.33,3915.72 v1(5233.43,3915.63) ; v1(5182.75,4258.98) 6618.73,4258.98 6754.6,4123.12 7052.68,4123.12 7261.61,3914.18 7975.52,3914.18 v1(8000,3889.7) ; R1a.1@7884.47,4123.12 v1(7954.16,4123.12) ; U5.195@7966.5,5232.85 7998.03,5232.85 8008.69,5243.51 v1(8009.86,5243.51)
CODEC_SDA: R1b.1 U1.1 U5.196 | length 4936.9
  Top Layer w6: v1(5128.92,4267.11) 5130.04,4265.99 5130.04,3937.26 v1(5131.16,3936.14) ; v1(8009.86,5207.15) 8009.86,5205 7999.49,5194.63 7999.49,4020.44 ; v1(8016.83,3916.3) 8016.83,3921.17 7999.49,3938.51 7999.49,4020.44 ; v1(8023.05,4020.44) 7999.49,4020.44
  Bottom Layer w6: v1(5128.92,4267.11) 5146.3,4284.49 5194.93,4284.49 5208.44,4270.98 6623.7,4270.98 6759.57,4135.12 7057.65,4135.12 7266.59,3926.18 7991.14,3926.18 8001.02,3916.3 v1(8016.83,3916.3) ; v1(5131.16,3936.14) 5131.48,3935.82 5181.55,3935.82 U1.1@5181.87,3935.5 ; R1b.1@7884.47,4043.17 7944.22,4043.17 7966.96,4020.44 v1(8023.05,4020.44) ; U5.196@7966.5,5213.17 7998.97,5213.17
DAC1_OUT1: C24.1 J1UI.A10 U5.57 | length 3075.7
  Top Layer w6: v1(5718.61,6041.21) 5718.87,6040.95 5718.87,5985.74 5715.35,5982.22 5644.68,5982.22 5639.76,5977.31 5639.76,5809.01 5601.01,5770.26 5601.01,5511.3 5604.53,5507.78 5949.72,5507.78 5953.24,5504.27 5953.24,5209.57 6005.61,5157.19 6005.61,5043.45 v1(6028.52,5020.54)
  Bottom Layer w6: v1(5718.61,6041.21) 5802.03,6041.21 5811.02,6050.2 C24.1@5811.02,6084.65 5862.21,6084.65 5901.57,6124.01 5901.57,6375.32 5905.09,6378.84 6122.88,6378.84 6141.04,6360.68 J1UI.A10@6141.04,6307.32 ; v1(6028.52,5020.54) 6052.16,5020.54 6091.57,5059.95 6564.43,5059.95 6568.95,5055.44 6804.83,5055.44 U5.57@6805.08,5055.69
DAC1_OUT2: C25.1 J1UI.A9 U5.58 | length 3090.5
  Top Layer w6: v1(5768.7,6175.2) 5739.61,6146.11 5739.61,5971.07 5736.09,5967.56 5655.28,5967.56 5651.76,5964.04 5651.76,5804.04 5613.01,5765.29 5613.01,5523.3 5616.53,5519.78 5961.72,5519.78 5965.24,5516.27 5965.24,5214.54 6033.18,5146.59 6033.18,5069.31 6042.08,5060.41 v1(6042.08,5056.8)
  Bottom Layer w6: v1(5768.7,6175.2) C25.1@5811.02,6175.2 5881.89,6175.2 5888.64,6181.95 5888.64,6382.73 5896.75,6390.84 6185.69,6390.84 6191.04,6385.49 J1UI.A9@6191.04,6307.32 ; v1(6042.08,5056.8) 6064.14,5056.8 6082.71,5075.37 U5.58@6805.08,5075.37
DAH_IRQ: D5.3 J1UI.A8 M32.1 P1.3 | length 7760
  Top Layer w6: v1(6241.04,6234.56) 6241.04,6183.24 6244.55,6179.72 6619.75,6179.72 6623.27,6183.24 6623.27,6250.07 6626.78,6253.58 7410.37,6253.58 ; v1(7410.64,6284.31) 7410.7,6284.25 7410.7,6253.58 7410.37,6253.58 ; M32.1@7411.42,6226.95 7411.42,6238.9 7410.37,6239.95 7410.37,6253.58 ; P1.3@8382.7,3196.78 8382.7,3231.92 8392.91,3242.13 8463.58,3242.13 8470.7,3249.24 8470.7,3381.24 8484.55,3395.09 8575.78,3395.09 8579.3,3398.61 8579.3,3811.58 8584.59,3816.87 8761.46,3816.87 8764.97,3820.38 8764.97,5442.81 8723.94,5483.84 8723.94,5920.28 8724.04,5920.38 8724.04,6336.93 8723.94,6337.03 8723.94,6468.5 8716.44,6476 v1(8667.2,6476)
  Bottom Layer w6: D5.3@5475.39,6431.1 5475.39,6406.35 5478.91,6402.84 6220.86,6402.84 6241.04,6382.66 J1UI.A8@6241.04,6307.32 v1(6241.04,6234.56) ; v1(7410.64,6284.31) 7408.1,6286.85 7395.49,6286.85 7376.7,6305.65 7376.7,6495.05 7364.99,6506.75 7364.99,6602.86 7368.5,6606.38 8548.95,6606.38 8581.7,6573.62 8581.7,6481.88 8587.58,6476 v1(8667.2,6476)
DIAL_DN: C31.1 TS1.d U5.166 | length 3250.5
  Top Layer w6: v1(8613.52,3753.05) 8613.52,3789.35 8617.04,3792.87 8785.46,3792.87 8788.97,3796.38 8788.97,5453.5 8748.47,5494 8748.47,5763.05 8755.66,5770.24 8755.66,5789.96 v1(8756.94,5791.24)
  Bottom Layer w6: U5.166@7966.5,5803.72 8296.02,5803.72 8324.89,5832.58 8419.06,5832.58 8423.44,5828.2 8423.44,5794.75 8426.95,5791.24 v1(8756.94,5791.24) ; C31.1@8438.53,3768.92 8499.02,3768.92 8514.39,3753.54 TS1.d@8566.14,3753.54 8566.63,3753.05 v1(8613.52,3753.05)
DIAL_UP: C30.1 TS1.b U5.46 | length 3301.1
  Top Layer w6: v1(6772.48,4629.12) 6772.48,4106.6 6800.52,4078.56 v1(6867.37,4078.56)
  Bottom Layer w6: v1(6772.48,4629.12) 6773.81,4629.12 6784.99,4617.94 6942.3,4617.94 6991,4666.64 6991,4836.23 7001.94,4847.17 U5.46@7001.93,4898.21 ; v1(6867.37,4078.56) 7060.19,4078.56 7251.11,3887.64 7478.36,3887.64 7501.88,3864.11 7501.88,3720.22 7515.33,3706.78 8373.22,3706.78 8376.74,3703.27 8376.74,3512.04 8393.31,3495.47 C30.1@8438.98,3495.47 8562.63,3495.47 8566.14,3498.99 TS1.b@8566.14,3553.54
DIT_IRQ: D4.3 J1UI.A18 M32a.1 P1.1 | length 8084.3
  Top Layer w6: v1(6240.14,6135.9) 6240.14,6159.79 6247.46,6167.11 6628.2,6167.11 6636.07,6174.97 6636.07,6238.07 6639.58,6241.58 7260.93,6241.58 ; M32a.1@7265.41,6010.36 7265.41,6237.11 7260.93,6241.58 ; v1(7369.16,6210.41) 7369.53,6210.78 7369.53,6238.07 7366.02,6241.58 7260.93,6241.58 ; P1.1@8482.7,3196.78 8482.7,3376.27 8489.52,3383.09 8587.78,3383.09 8591.3,3386.61 8591.3,3801.35 8594.81,3804.87 8772.92,3804.87 8776.97,3808.92 8776.97,5447.78 8735.94,5488.81 8735.94,5915.31 8736.04,5915.41 8736.04,6341.9 8735.94,6342 8735.94,6537.43 8723.16,6550.21 8691.65,6550.21 8691.5,6550.36 8660.18,6550.36 8649.04,6561.49 v1(8649.04,6588.9)
  Bottom Layer w6: D4.3@5307.09,5985.59 5334.82,5985.59 5338.33,5982.07 5338.33,5963.68 5341.85,5960.17 6213.51,5960.17 6241.04,5987.69 J1UI.A18@6241.04,6090.79 6241.04,6135.01 v1(6240.14,6135.9) ; v1(7369.16,6210.41) 7369.16,6251.55 7364.7,6256.01 7364.7,6490.08 7352.99,6501.78 7352.99,6607.83 7363.53,6618.38 8558.75,6618.38 8588.31,6588.82 8648.96,6588.82 v1(8649.04,6588.9)
DSI_CLK_N: J7.15 U5.125 | length 6849.6
  Top Layer w6: v1(4387.22,4931.65) 4403.13,4915.74 5268,4915.74 5278.1,4925.83 v1(5280.51,4925.83)
  Bottom Layer w6: v1(4387.22,4931.65) 4389.92,4931.65 4399.73,4921.84 4438.67,4921.84 4452,4908.51 4452,4880.84 4435.15,4863.98 4090.84,4863.98 4067.35,4887.48 4067.35,6523.09 4138.56,6594.3 7176.13,6594.3 7273.68,6496.75 7273.68,6082.76 7277.53,6078.91 U5.125@7277.53,6059.62 ; J7.15@5193.86,4915.35 5194.59,4914.63 5266.89,4914.63 5278.1,4925.83 v1(5280.51,4925.83)
DSI_CLK_P: J7.14 U5.124 | length 6738.8
  Top Layer w6: v1(4387.53,4900.03) 4413.15,4900.03 4416.66,4903.54 5268.23,4903.54 5278.14,4893.64 v1(5280.75,4893.64)
  Bottom Layer w6: v1(4387.53,4900.03) 4390.23,4900.03 4400.04,4909.84 4430.19,4909.84 4440,4900.03 4440,4885.81 4430.18,4875.98 4095.81,4875.98 4079.35,4892.45 4079.35,6518.12 4143.53,6582.3 7171.16,6582.3 7261.68,6491.78 7261.68,6082.76 7257.84,6078.91 U5.124@7257.84,6059.62 ; J7.14@5193.86,4895.67 5193.95,4895.76 5278.62,4895.76 v1(5280.75,4893.64)
DSI_D0_N: J7.18 U5.122 | length 6448.9
  Top Layer w6: v1(4316.93,4978.83) 4320.09,4978.83 4329.44,4969.48 5236.25,4969.48 5245.6,4978.83 v1(5248.76,4978.83)
  Bottom Layer w6: v1(4316.93,4978.83) 4320.09,4978.83 4329.44,4969.48 4337.28,4969.48 4352.09,4984.29 4352.09,5033.55 4340.27,5045.37 4101.75,5045.37 4091.35,5055.77 4091.35,6513.15 4148.5,6570.3 7166.19,6570.3 7214.63,6521.86 7214.63,6082.76 7218.47,6078.91 U5.122@7218.47,6059.62 ; J7.18@5193.86,4974.41 5239.47,4974.41 5243.89,4978.83 v1(5248.76,4978.83)
DSI_D0_P: J7.17 U5.121 | length 6427.8
  Top Layer w6: v1(4316.93,4948.13) 4320.09,4948.13 4329.44,4957.48 5235.2,4957.48 5244.55,4948.13 v1(5247.71,4948.13)
  Bottom Layer w6: v1(4316.93,4948.13) 4320.09,4948.13 4329.44,4957.48 4342.25,4957.48 4364.09,4979.32 4364.09,5038.52 4345.24,5057.37 4106.86,5057.37 4103.35,5060.88 4103.35,6508.18 4153.48,6558.3 7161.22,6558.3 7202.63,6516.89 7202.63,6082.76 7198.79,6078.91 U5.121@7198.79,6059.62 ; J7.17@5193.86,4954.72 5236.25,4954.72 5242.84,4948.13 v1(5247.71,4948.13)
DSI_D1_N: J7.12 U5.128 | length 6994.3
  Top Layer w6: v1(4469.96,4862.98) 4472.01,4862.98 4483.19,4851.79 4495.03,4851.79 5233.12,4851.79 5244.96,4863.63 v1(5245.63,4863.63)
  Bottom Layer w6: 4041.15,4922.24 4041.15,4829.68 4096.78,4774.04 4526.04,4774.04 4536.59,4784.59 4536.59,4837.41 4522.07,4851.93 4482.48,4851.93 4471.43,4862.98 v1(4469.96,4862.98) ; 4041.15,4924.21 4041.15,6530.83 4128.62,6618.3 7186.07,6618.3 7332.74,6471.63 7332.74,6082.76 7336.58,6078.91 U5.128@7336.58,6059.62 ; J7.12@5193.86,4856.3 5233.43,4856.3 5240.76,4863.63 v1(5245.63,4863.63)
DSI_D1_P: J7.11 U5.127 | length 6898.6
  Top Layer w6: v1(4470.55,4828.89) 4470.55,4827.96 4472.26,4826.25 4485.8,4839.79 5233.02,4839.79 5244.86,4827.95 v1(5245.53,4827.95)
  Bottom Layer w6: v1(4470.55,4828.89) 4472.02,4828.89 4483.07,4839.93 4517.1,4839.93 4524.59,4832.44 4524.59,4789.56 4521.07,4786.04 4101.75,4786.04 4053.15,4834.65 4053.15,4922.24 4053.15,6525.86 4133.59,6606.3 7181.1,6606.3 7320.74,6466.66 7320.74,6082.76 7316.9,6078.91 U5.127@7316.9,6059.62 ; J7.11@5193.86,4836.61 5233.02,4836.61 5241.68,4827.95 v1(5245.53,4827.95)
DSI_RESET: J7.9 J8.7 M10.1 | length 1741.8
  Top Layer w6: v1(5337.63,5297.26) 5337.6,5537.53 v1(5352.81,5552.74) ; v1(5691.02,5592.69) 5827.51,5592.69 5840.1,5605.28 5840.1,5785.51 5851.37,5796.78 M10.1@5897.53,5796.78
  Bottom Layer w6: J7.9@5193.86,4797.24 5309.06,4797.24 5315.94,4804.13 5315.94,5242.99 5337.63,5264.68 v1(5337.63,5297.26) ; J8.7@5306.22,5521.65 5352.7,5521.65 ; v1(5352.81,5552.74) 5352.7,5552.63 5352.7,5521.65 ; v1(5691.02,5592.69) 5687.92,5592.69 5674.62,5605.99 5465.15,5605.99 5380.81,5521.65 5352.7,5521.65
DSI_TE: J7.8 U5.88 | length 2487.8
  Top Layer w6: v1(5361.05,5397.46) 5446.56,5397.46 5462.47,5381.55 5570.88,5381.55 5574.39,5385.07 5574.39,5468.29 5577.9,5471.8 v1(5895.41,5471.8)
  Bottom Layer w6: J7.8@5193.86,4777.56 5316.63,4777.56 5329.96,4790.88 5329.96,5239.8 5361.05,5270.89 v1(5361.05,5397.46) ; v1(5895.41,5471.8) 5895.41,5475.11 5886.2,5484.32 5886.2,5636.57 5893.44,5643.81 6093.52,5643.81 6115.63,5665.92 U5.88@6805.08,5665.92
ENC2_I: J1UI.A4 U5.190 | length 3688.1
  Top Layer w6: v1(6442.81,6381.8) 6444.08,6381.8 6455.33,6393.04 7032.86,6393.04 7070.91,6431.1 7070.91,6525.68 7074.43,6529.19 7373.47,6529.19 7384.03,6518.64 v1(7385.99,6518.64) ; v1(8025.42,6550.36) 8164.75,6550.36 8210.41,6504.7 8210.41,5756.96 8175.72,5722.27 v1(8175.72,5696.1)
  Bottom Layer w6: J1UI.A4@6441.04,6307.32 6442.81,6309.1 v1(6442.81,6381.8) ; v1(7385.99,6518.64) 7417.71,6550.36 v1(8025.42,6550.36) ; U5.190@7966.5,5331.28 7985.79,5331.28 7993.99,5323.08 8021.1,5323.08 8069.55,5274.63 8304.59,5274.63 8308.1,5278.14 8308.1,5615.2 8245.75,5677.55 8194.27,5677.55 v1(8175.72,5696.1)
ENC2_Q: J1UI.A5 U5.143 | length 1731.4
  Top Layer w6: v1(6389.96,6263.03) 6405.66,6278.73 7091.72,6278.73 7150.96,6337.97 7582.06,6337.97 7626.97,6382.87 v1(7678.58,6382.87)
  Bottom Layer w6: v1(6389.96,6263.03) 6391.04,6264.11 J1UI.A5@6391.04,6307.32 ; U5.143@7631.86,6059.62 7631.86,6104.28 7624.86,6111.27 7624.86,6284.25 7678.58,6337.97 v1(7678.58,6382.87)
FAN_ON: M38.1 SW1.1 | length 7341.1
  Top Layer w6: v1(1242.93,6476.2) 1242.93,6477.06 1202.28,6517.72 1202.28,6667.49 1206.24,6671.44 1467.96,6671.44 1471.47,6667.93 1471.47,6606.28 2262.8,6606.28 2270.67,6598.41 2270.67,6500.56 2274.18,6497.05 2420.41,6497.05 2423.92,6500.56 2423.92,6546.46 2427.43,6549.98 2666.18,6549.98 2669.7,6546.46 2669.7,6331.63 2673.21,6328.12 5937.73,6328.12 6002.14,6392.52 6245.22,6392.52 6282.68,6429.98 7017.34,6429.98 7034.91,6447.56 7034.91,6540.59 7060.27,6565.94 7647.98,6565.94 7658.83,6555.1 M38.1@7658.83,6517.36
  Bottom Layer w6: v1(1242.93,6476.2) 1242.93,6429.7 SW1.1@1243.5,6429.13
FAN_ON1: J3UI.A10 SW1.2 | length 1802.1
  Top Layer w6: v1(1244.09,6359.25) 1269.68,6359.25 1281.98,6371.54 1281.98,6493.53 1278.46,6497.05 1251.97,6497.05 1214.57,6534.45 1214.57,6584.42 1218.08,6587.93 v1(1392.92,6587.93) ; v1(1392.92,6316.14) 1829.92,6316.14 1873.89,6360.11 2231.42,6360.11 2253.18,6338.36 v1@2323.24,6338.36
  Bottom Layer w6: SW1.2@1243.52,6311.03 1244.09,6311.61 v1(1244.09,6359.25) ; v1(1392.92,6316.14) v1(1392.92,6587.93) ; J3UI.A10@2323.03,6293.31 2323.27,6293.55 v1(2323.27,6338.32)
FMC_A0: U5.22 U8.25 | length 3495.2
  Top Layer w6: v1(7468.95,4980.89) 7468.08,4980.02 7468.08,4960.09 7474.38,4953.8 7474.38,3804.78 7474.38,3504.92 7474.38,3483.71 7496.96,3483.71 7496.96,3457.71 7474.38,3457.71 7474.38,3431.71 7503.52,3431.71 7503.52,3405.71 7474.38,3405.71 7474.38,3379.71 7503.52,3379.71 7503.52,3353.71 7474.38,3353.71 7474.38,3327.71 7503.52,3327.71 7503.52,3301.71 7474.38,3301.71 7474.38,3275.71 7503.52,3275.71 7503.52,3249.71 7474.38,3249.71 7474.38,3223.71 7503.52,3223.71 7503.52,3197.71 7474.38,3197.71 7474.38,3171.71 7503.52,3171.71 7503.52,3145.71 7474.38,3145.71 7474.38,3119.71 7503.52,3119.71 7503.52,3093.71 7474.38,3093.71 7474.38,3067.71 7480.05,3067.71 7483.05,3064.71 7488.13,3059.63 7488.13,3008.18 7477.69,2997.74 v1(7475.15,2997.74)
  Bottom Layer w6: U8.25@6632.13,3112.61 6632.13,3005.01 6641.08,2996.07 7074.08,2996.07 7074.2,2995.95 7473.35,2995.95 v1(7475.15,2997.74) ; v1(7468.95,4980.89) 7468.95,4959.23 7473.69,4954.48 7473.69,4898.89 U5.22@7474.38,4898.21
FMC_A1: U5.23 U8.26 | length 3476.1
  Top Layer w6: v1@7454.69,4935.21 7454.69,3819.46 7454.69,3814.85 7462.38,3807.17 7462.38,3771.61 7455.88,3771.61 7455.88,3745.61 7462.38,3745.61 7462.38,3719.61 7439.32,3719.61 7439.32,3693.61 7462.38,3693.61 7462.38,3667.61 7439.32,3667.61 7439.32,3641.61 7462.38,3641.61 7462.38,3615.61 7439.32,3615.61 7439.32,3589.61 7462.38,3589.61 7462.38,3563.61 7439.32,3563.61 7439.32,3537.61 7462.38,3537.61 7462.38,3511.61 7439.32,3511.61 7439.32,3485.61 7462.38,3485.61 7462.38,3459.61 7439.32,3459.61 7439.32,3433.61 7462.38,3433.61 7462.38,3407.61 7439.32,3407.61 7439.32,3381.61 7462.38,3381.61 7462.38,3355.61 7439.32,3355.61 7439.32,3329.61 7462.38,3329.61 7462.38,3303.61 7439.32,3303.61 7439.32,3277.61 7462.38,3277.61 7462.38,3251.61 7439.32,3251.61 7439.32,3225.61 7462.38,3225.61 7462.38,3199.61 7439.32,3199.61 7439.32,3173.61 7462.38,3173.61 7462.38,3147.61 7439.32,3147.61 7439.32,3121.61 7462.38,3121.61 7462.38,3095.61 7439.32,3095.61 7439.32,3069.61 7462.38,3069.61 7462.38,3066.61 7462.38,3052.58 7463.64,3051.32 v1(7463.64,3031.91)
  Bottom Layer w6: U8.26@6651.82,3112.61 6651.82,3019.33 6663.08,3008.07 7079.05,3008.07 7079.17,3007.95 7439.68,3007.95 v1(7463.64,3031.91) ; U5.23@7454.69,4898.21 v1@7454.69,4935.21
  other v1: 7451.45,4944.38
FMC_A2: U5.24 U8.27 | length 3420.1
  Top Layer w6: v1(7422.76,3030.33) 7426.21,3033.77 7426.21,3046.5 7427.32,3047.61 7427.32,3444.7 7427.32,3447.7 7405.52,3447.7 7405.52,3473.7 7427.32,3473.7 7427.32,3499.7 7405.52,3499.7 7405.52,3525.7 7427.32,3525.7 7427.32,3551.7 7405.52,3551.7 7405.52,3577.7 7427.32,3577.7 7427.32,3603.7 7405.52,3603.7 7405.52,3629.7 7427.32,3629.7 7427.32,3655.7 7405.52,3655.7 7405.52,3681.7 7427.32,3681.7 7427.32,3707.7 7405.52,3707.7 7405.52,3733.7 7443.21,3733.7 7443.21,3759.7 7405.52,3759.7 7405.52,3785.7 7443.11,3785.7 7443.11,3811.7 7405.52,3811.7 7405.52,3837.7 7442.69,3837.7 7442.69,3863.7 7405.52,3863.7 7405.52,3889.7 7427.32,3889.7 7427.32,3904.8 7427.32,4940.18 7427.32,4952.58 7445.52,4970.78 v1(7445.52,5000.78)
  Bottom Layer w6: U8.27@6671.5,3112.61 6671.5,3028.64 6680.08,3020.07 7372.81,3020.07 7383.07,3030.33 v1(7422.76,3030.33) ; U5.24@7435.01,4898.21 7435.01,4931.12 7430.45,4935.68 7430.45,4953.67 7445.52,4968.74 v1(7445.52,5000.78)
FMC_A3: U5.25 U8.60 | length 3485.8
  Top Layer w6: v1(7414.01,4972.78) 7393.52,4952.3 7393.52,3457.71 7393.52,3419.58 7405.95,3419.58 7405.95,3393.58 7393.52,3393.58 7393.52,3367.58 7415.32,3367.58 7415.32,3341.58 7393.52,3341.58 7393.52,3315.58 7415.32,3315.58 7415.32,3289.58 7393.52,3289.58 7393.52,3263.58 7415.32,3263.58 7415.32,3237.58 7393.52,3237.58 7393.52,3211.58 7415.32,3211.58 7415.32,3185.58 7393.52,3185.58 7393.52,3159.58 7415.32,3159.58 7415.32,3133.58 7393.52,3133.58 7393.52,3107.58 7415.32,3107.58 7415.32,3081.58 7393.52,3081.58 7393.52,3052.58 7393.52,2928.04 7427.32,2894.24 v1(7472.52,2849.04)
  Bottom Layer w6: U8.60@6671.5,2679.53 6671.5,2825.24 6675.02,2828.76 7456.81,2828.76 7472.52,2844.46 v1(7472.52,2849.04) ; v1(7414.01,4972.78) 7414.66,4972.12 7414.66,4898.86 U5.25@7415.32,4898.21
FMC_A4: U5.26 U8.61 | length 3464.8
  Top Layer w6: v1(7387.52,4999.84) 7387.52,4963.27 7381.52,4957.27 7381.52,4345.21 7381.52,4326.06 7364.25,4326.06 7364.25,4300.06 7381.52,4300.06 7381.52,4274.06 7364.25,4274.06 7364.25,4248.06 7381.52,4248.06 7381.52,4222.06 7364.25,4222.06 7364.25,4196.06 7381.52,4196.06 7381.52,4170.06 7364.25,4170.06 7364.25,4144.06 7381.52,4144.06 7381.52,4118.06 7364.25,4118.06 7364.25,4092.06 7381.52,4092.06 7381.52,4066.06 7364.25,4066.06 7364.25,4040.06 7381.52,4040.06 7381.52,4014.06 7364.25,4014.06 7364.25,3988.06 7381.52,3988.06 7381.52,3962.06 7380.26,3962.06 7380.26,3936.06 7381.52,3936.06 7381.52,3933.06 7381.52,2908.85 v1(7434.02,2856.35)
  Bottom Layer w6: U8.61@6651.82,2679.53 6651.82,2837.24 6655.33,2840.76 7418.42,2840.76 v1(7434.02,2856.35) ; v1(7387.52,4999.84) 7387.52,4964.32 7395.64,4956.21 U5.26@7395.64,4898.21
FMC_A5: U5.27 U8.62 | length 3421.8
  Top Layer w6: v1(7352.25,5003.12) 7352.25,3947.97 7369.52,3930.7 7369.52,3279.84 7369.52,3267.59 7351.49,3267.59 7351.49,3241.59 7369.52,3241.59 7369.52,3215.59 7351.49,3215.59 7351.49,3189.59 7369.52,3189.59 7369.52,3163.59 7351.49,3163.59 7351.49,3137.59 7369.52,3137.59 7369.52,3111.59 7351.49,3111.59 7351.49,3085.59 7369.52,3085.59 7369.52,3059.59 7351.49,3059.59 7351.49,3033.59 7369.52,3033.59 7369.52,3007.59 7351.49,3007.59 7351.49,2981.59 7369.52,2981.59 7369.52,2955.59 7351.49,2955.59 7351.49,2929.59 7369.52,2929.59 7369.52,2926.59 7369.52,2868.78 v1@7374.52,2863.78
  Bottom Layer w6: U8.62@6632.13,2679.53 6632.13,2852.39 6641.5,2861.76 v1@7361.52,2861.76 ; v1(7352.25,5003.12) 7352.25,4971.89 7375.95,4948.19 U5.27@7375.95,4898.21
  other v1: 7369.52,2861.76
FMC_A6: U5.68 U8.63 | length 3467.8
  Top Layer w6: v1(6614.52,2626.59) 6612.11,2629 6612.11,2663.78 6612.11,2666.78 6605.52,2666.78 6605.52,2678.78 6629.18,2678.78 6629.18,2690.78 6605.52,2690.78 6605.52,2702.78 6629.18,2702.78 6629.18,2714.78 6605.52,2714.78 6605.52,2726.78 6629.18,2726.78 6629.18,2738.78 6605.52,2738.78 6605.52,2750.78 6629.18,2750.78 6629.18,2762.78 6605.52,2762.78 6605.52,2774.78 6627.73,2774.78 6627.73,2786.78 6612.11,2786.78 6612.11,2861.23 6612.11,3596.43 6714.46,3698.78 6789.52,3698.78 6810.85,3720.11 v1(6810.88,3744.78) ; v1(6809.22,3904.8) 6809.52,3905.11 6809.52,3971.78 6763.04,4018.27 6749.01,4018.27 6731.45,4035.83 6731.45,4088.5 6648.11,4171.83 6648.11,4284.47 6609.52,4323.06 6609.52,5261.01 6614.15,5265.64 v1(6868.38,5265.64)
  Bottom Layer w6: U8.63@6612.45,2679.53 6613.1,2678.88 6613.1,2628.01 v1(6614.52,2626.59) ; U5.68@6805.08,5272.22 6843.7,5272.22 6850.29,5265.64 v1(6868.38,5265.64) ; v1(6809.22,3904.8) 6809.22,3746.44 v1(6810.88,3744.78)
FMC_A7: U5.69 U8.64 | length 3468.4
  Top Layer w6: v1(6593.52,2583.57) 6622.31,2583.57 6647.52,2608.78 6647.52,3614.87 6719.43,3686.78 6800.52,3686.78 6841.52,3727.78 v1(6841.52,3746.78) ; v1@6778.52,3971.78 6732.09,4018.21 6719.45,4018.21 6719.45,4083.53 6636.11,4166.86 6636.11,4279.5 6596.52,4319.09 6596.52,5272.68 6611.67,5287.83 6869.48,5287.83 6874.36,5292.71 v1(6895.19,5292.71)
  Bottom Layer w6: U8.64@6593.11,2679.88 U8.64@6592.76,2679.53 6592.76,2583.54 v1@6593.52,2582.78 ; v1(6778.52,3972.57) 6835.5,3915.59 6835.5,3876.78 6828.98,3870.26 6828.98,3807.78 6841.52,3795.24 v1(6841.52,3746.78) ; U5.69@6805.08,5291.91 6841.34,5291.91 6843.97,5289.28 6861.37,5289.28 6864,5291.91 6894.39,5291.91 v1(6895.19,5292.71)
FMC_A8: U5.70 U8.65 | length 3466.4
  Top Layer w6: v1(6571.76,2626.59) 6573.11,2627.94 6573.11,2643.94 6573.11,2658.94 6578.22,2658.94 6578.22,2670.94 6561.57,2670.94 6561.57,2682.94 6578.22,2682.94 6578.22,2694.94 6561.57,2694.94 6561.57,2706.94 6578.22,2706.94 6578.22,2718.94 6561.57,2718.94 6561.57,2730.94 6578.22,2730.94 6578.22,2742.94 6561.57,2742.94 6561.57,2754.94 6578.22,2754.94 6578.22,2766.94 6561.57,2766.94 6561.57,2778.94 6578.22,2778.94 6578.22,2790.94 6561.57,2790.94 6561.57,2802.94 6578.22,2802.94 6578.22,2814.94 6566.5,2814.94 6566.5,2826.94 6573.11,2826.94 6573.11,2942.01 6573.11,3728.37 6589.52,3744.78 v1(6705.18,3744.78) ; v1@6743.45,3971.94 6707.45,4007.94 6707.45,4078.56 6624.11,4161.89 6624.11,4274.53 6584.52,4314.12 6584.52,5282.97 6611.83,5310.28 v1(6852.67,5310.28)
  Bottom Layer w6: v1(6571.76,2626.59) 6572.42,2627.25 6572.42,2678.88 U8.65@6573.08,2679.53 ; v1(6705.18,3744.78) 6705.18,3907.14 6744.81,3946.77 v1(6744.81,3972.38) ; U5.70@6805.08,5311.59 6851.35,5311.59 v1(6852.67,5310.28)
FMC_A9: U5.71 U8.66 | length 3401
  Top Layer w6: v1(6554.6,2584.1) 6574.43,2603.94 6578.81,2603.94 6593.52,2618.65 6593.52,3698.78 6614.85,3720.11 v1(6678.52,3720.11) ; v1(6707.45,3970.68) 6705.18,3972.94 6705.18,3986.12 6695.45,3995.86 6695.45,4073.59 6612.11,4156.92 6612.11,4269.56 6566.52,4315.15 6566.52,5294.35 6605.78,5333.61 v1(6892.46,5333.61)
  Bottom Layer w6: v1@6553.11,2583.54 6553.39,2583.83 6553.39,2615.26 6550.76,2617.89 6550.76,2635.29 6553.39,2637.92 U8.66@6553.39,2679.53 U8.66@6553.11,2679.82 ; v1(6678.52,3720.11) 6678.52,3904.05 6707.45,3932.98 v1(6707.45,3970.68) ; U5.71@6805.08,5331.28 6871.77,5331.28 6874.11,5333.61 v1(6892.46,5333.61)
FMC_A10: U5.72 U8.24 | length 3481.3
  Top Layer w6: v1(6678.52,3938.57) 6678.52,3956.95 6683.45,3961.87 6683.45,4068.62 6597.11,4154.95 6597.11,4253.66 6552.6,4298.18 6552.6,5332.06 6576.57,5356.04 v1(6852.29,5356.04)
  Bottom Layer w6: U8.24@6612.45,3112.61 6612.45,3503.15 6612.45,3506.15 6590.57,3506.15 6590.57,3518.15 6617.46,3518.15 6617.46,3530.15 6590.57,3530.15 6590.57,3542.15 6617.46,3542.15 6617.46,3554.15 6590.57,3554.15 6590.57,3566.15 6617.46,3566.15 6617.46,3578.15 6590.57,3578.15 6590.57,3590.15 6617.46,3590.15 6617.46,3602.15 6590.57,3602.15 6590.57,3614.15 6617.46,3614.15 6617.46,3626.15 6590.57,3626.15 6590.57,3638.15 6617.46,3638.15 6617.46,3650.15 6590.57,3650.15 6590.57,3662.15 6617.46,3662.15 6617.46,3674.15 6590.57,3674.15 6590.57,3686.15 6617.46,3686.15 6617.46,3698.15 6590.57,3698.15 6590.57,3710.15 6617.46,3710.15 6617.46,3722.15 6590.57,3722.15 6590.57,3734.15 6617.46,3734.15 6617.46,3746.15 6590.57,3746.15 6590.57,3758.15 6617.46,3758.15 6617.46,3770.15 6590.57,3770.15 6590.57,3782.15 6617.46,3782.15 6617.46,3794.15 6590.57,3794.15 6590.57,3806.15 6617.46,3806.15 6617.46,3818.15 6590.57,3818.15 6590.57,3830.15 6617.46,3830.15 6617.46,3842.15 6590.57,3842.15 6590.57,3854.15 6617.46,3854.15 6617.46,3866.15 6612.45,3866.15 6612.45,3870.26 6612.45,3893.7 6656.53,3937.78 v1@6678.52,3937.78 ; U5.72@6805.33,5351.21 U5.72@6805.08,5350.96 6842.34,5350.96 6847.42,5356.04 v1(6852.29,5356.04)
FMC_A11: U5.75 U8.21 | length 3494.8
  Top Layer w6: v1(6662.45,3970.57) 6662.45,4062.62 6585.11,4139.95 6585.11,4248.69 6538.79,4295.01 6538.79,5392.53 6552.53,5406.27 v1(6887.49,5406.27)